# Altium PCB main.PcbDoc
Units mm, origin at the board's own origin, x right, y up, seen from the top; angles counter-clockwise.
Board outline 51 x 57 mm, 4 copper layers (Top Layer, Int1 (GND), Int2 (PWR), Bottom Layer), stack 1.369 mm thick; 45 components, 57 nets, 218 pads, 122 vias.
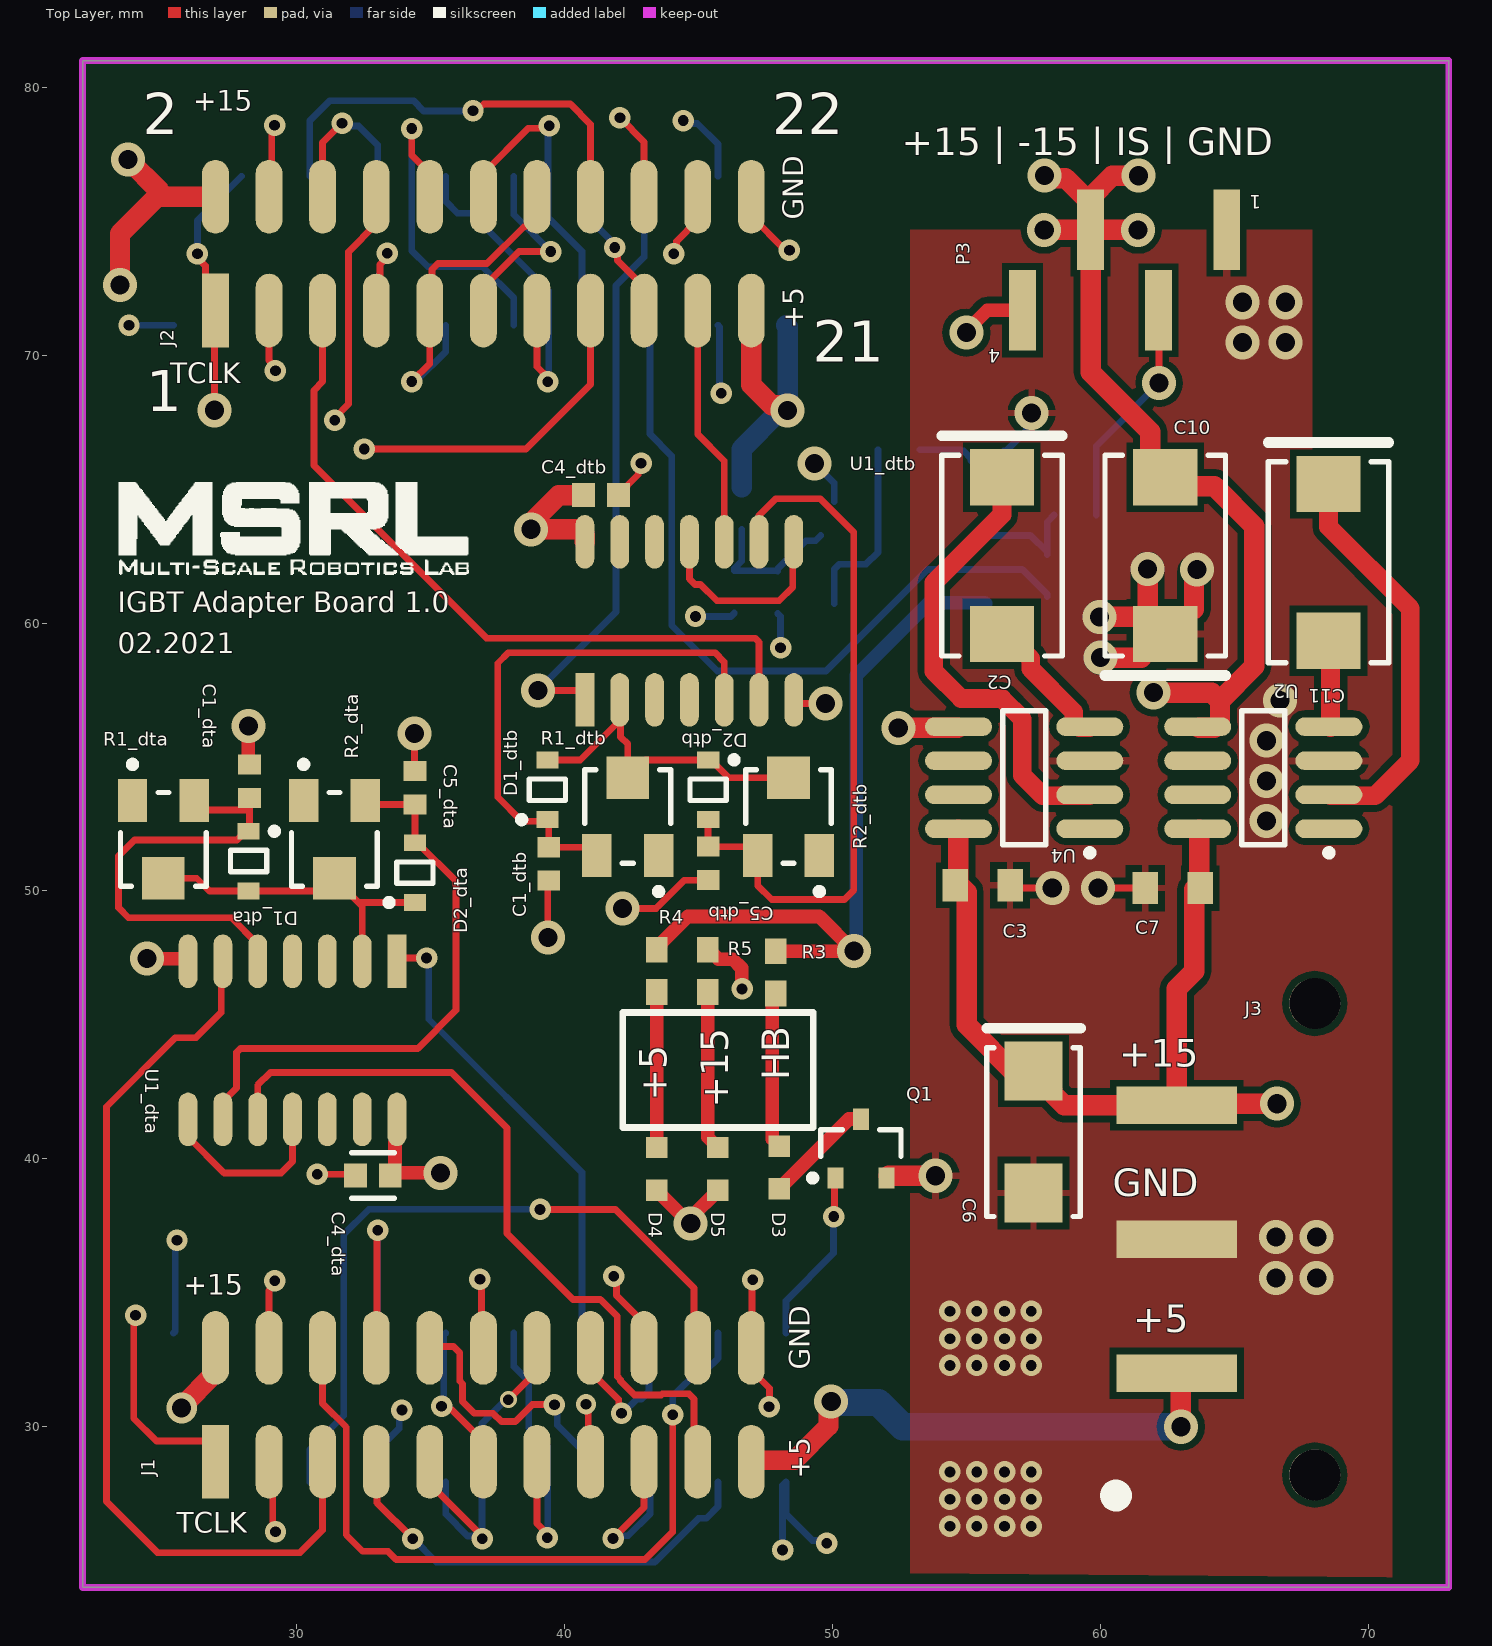
[diagram p0: Top Layer view]
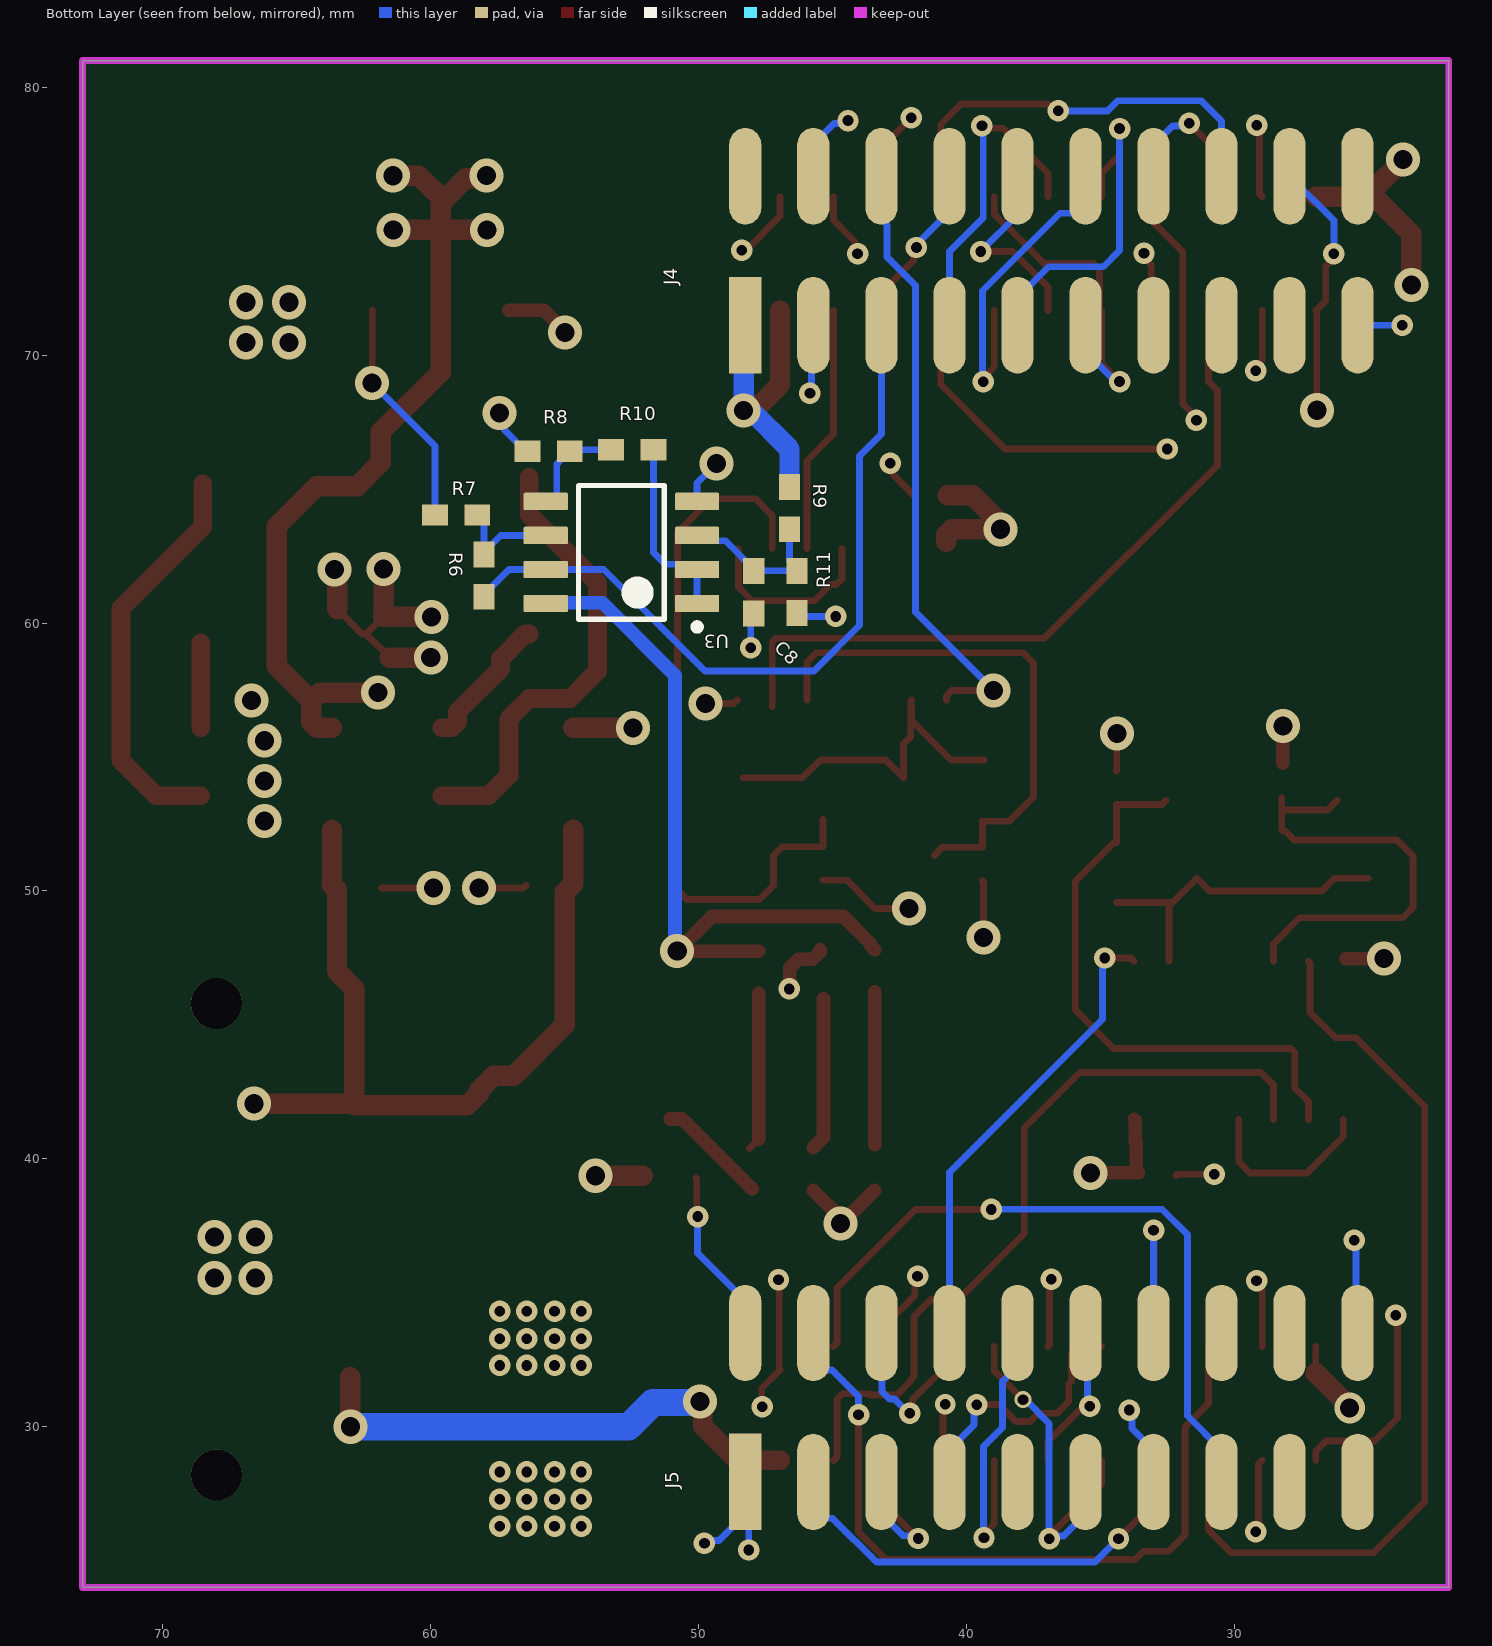
[diagram p1: Bottom Layer view, seen from below]
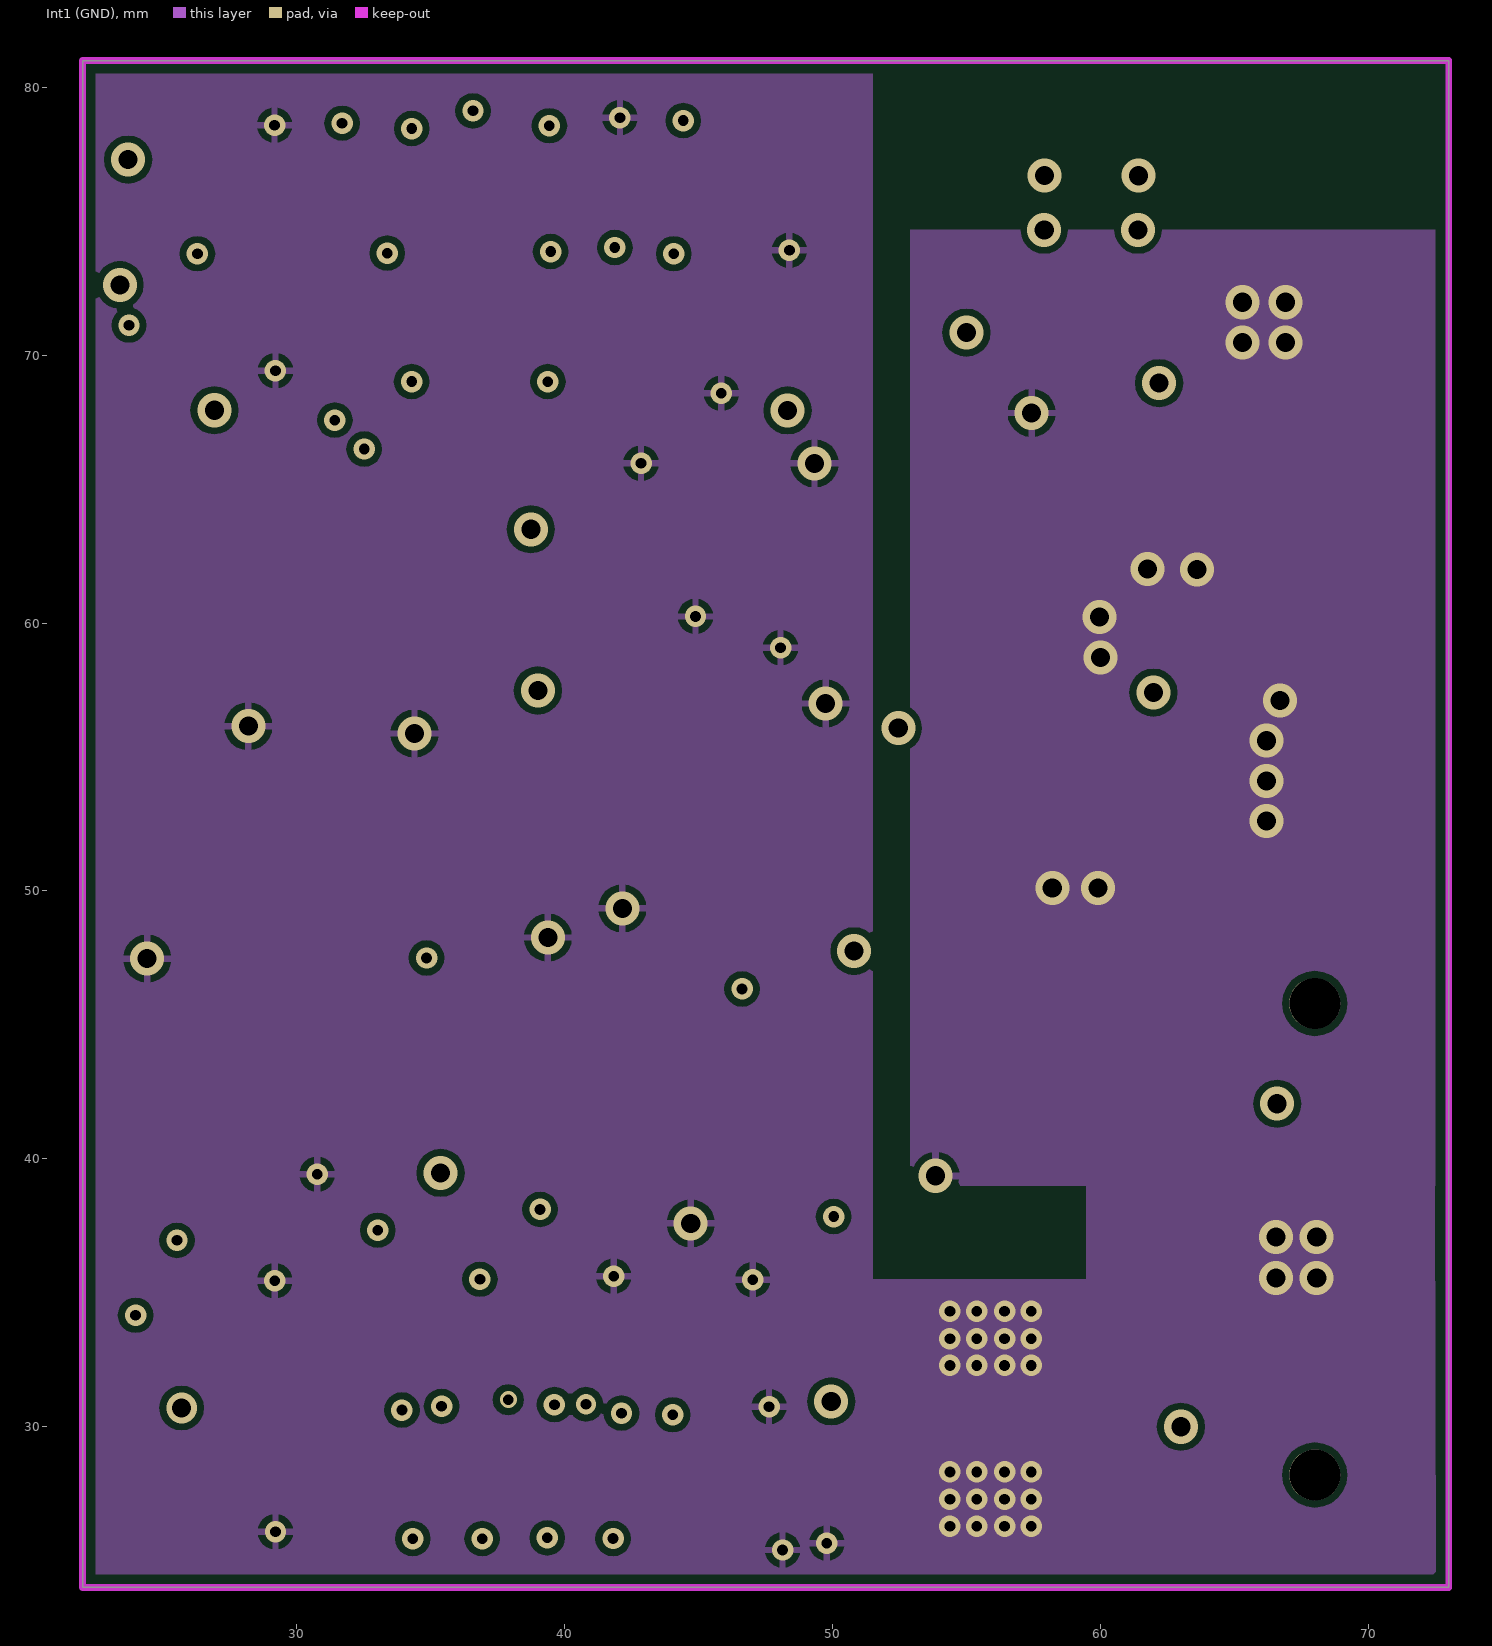
[diagram p2: Int1 (GND)]
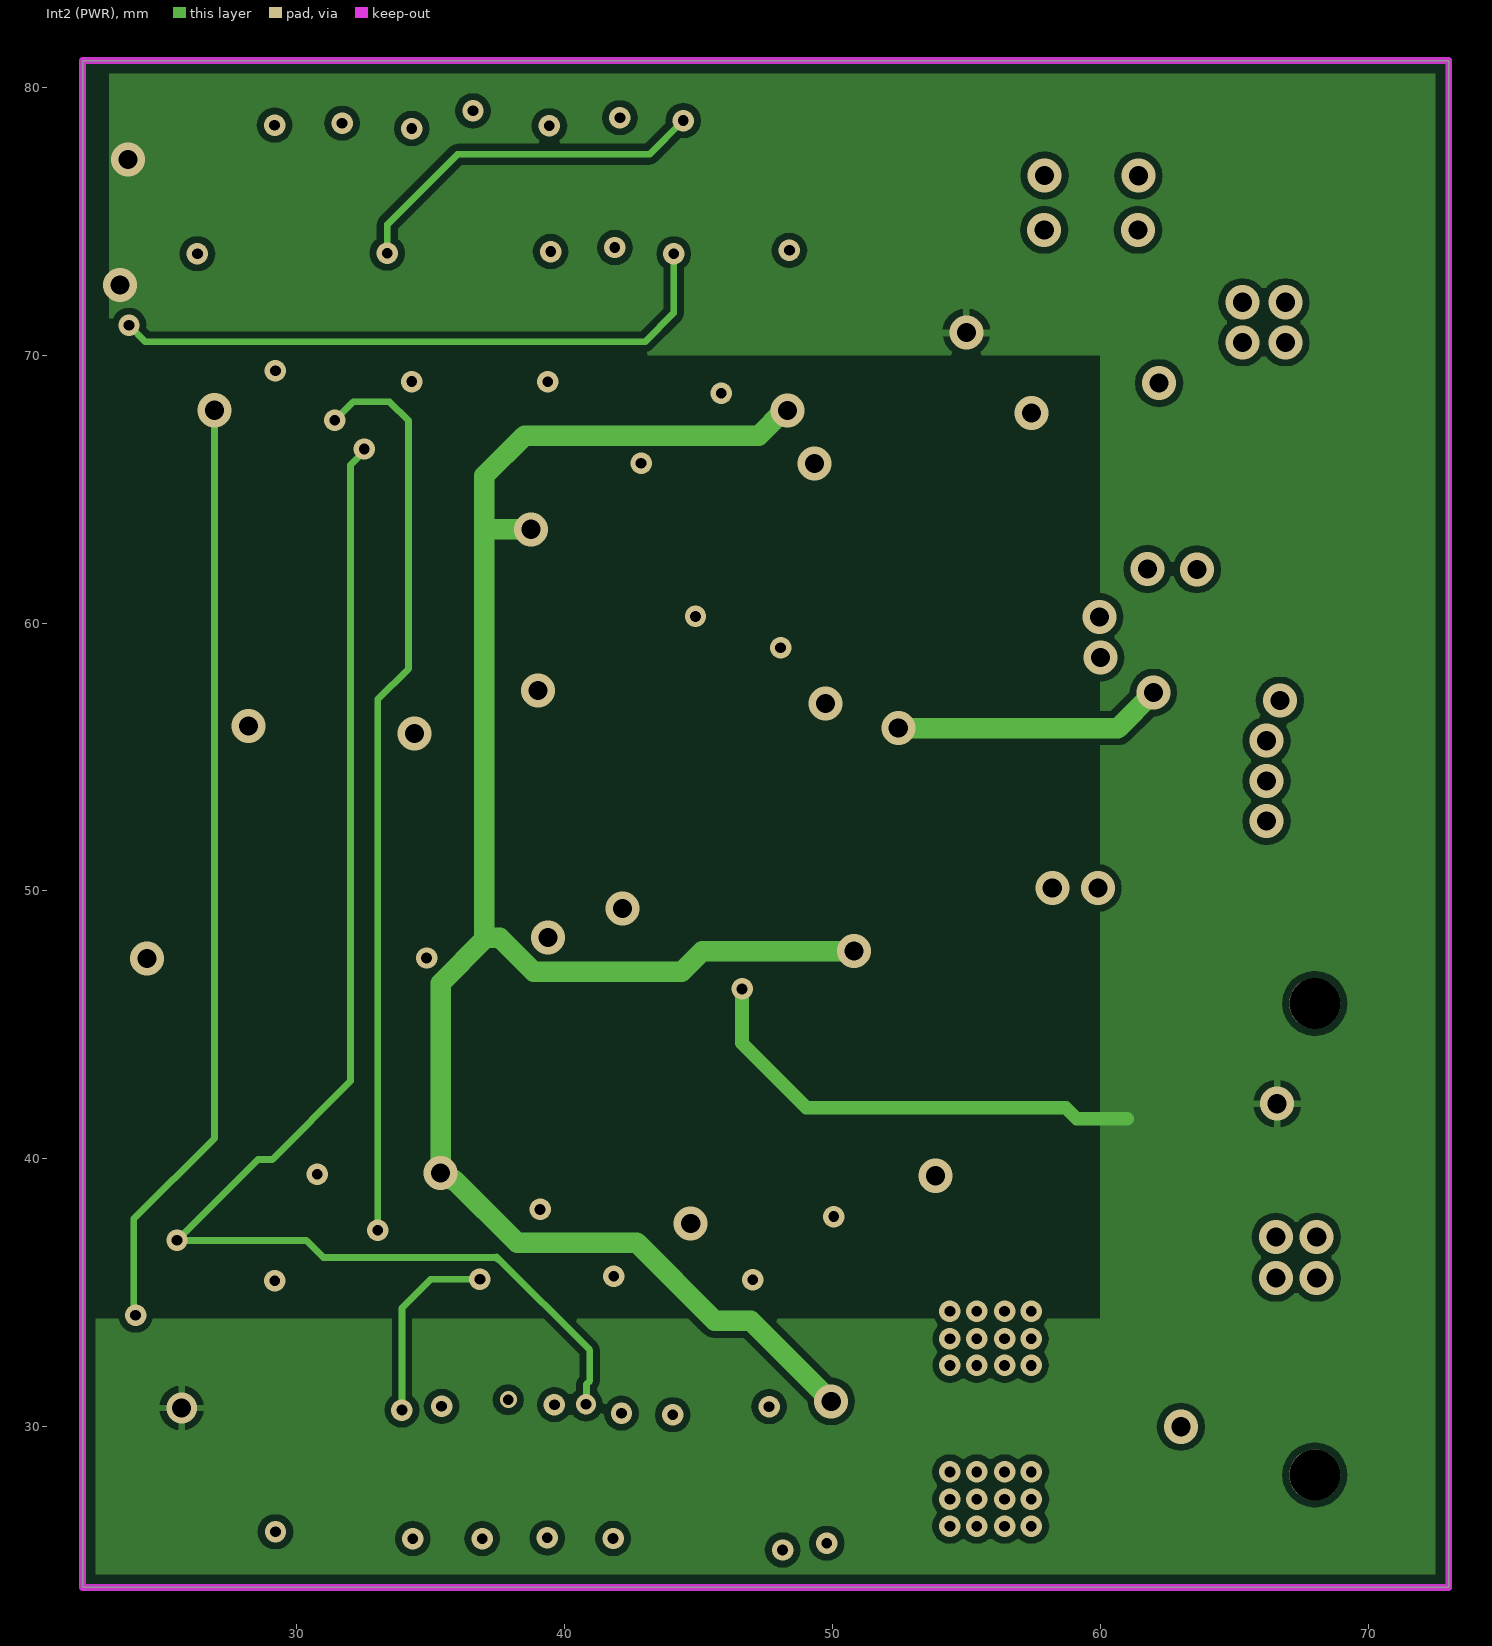
[diagram p3: Int2 (PWR)]
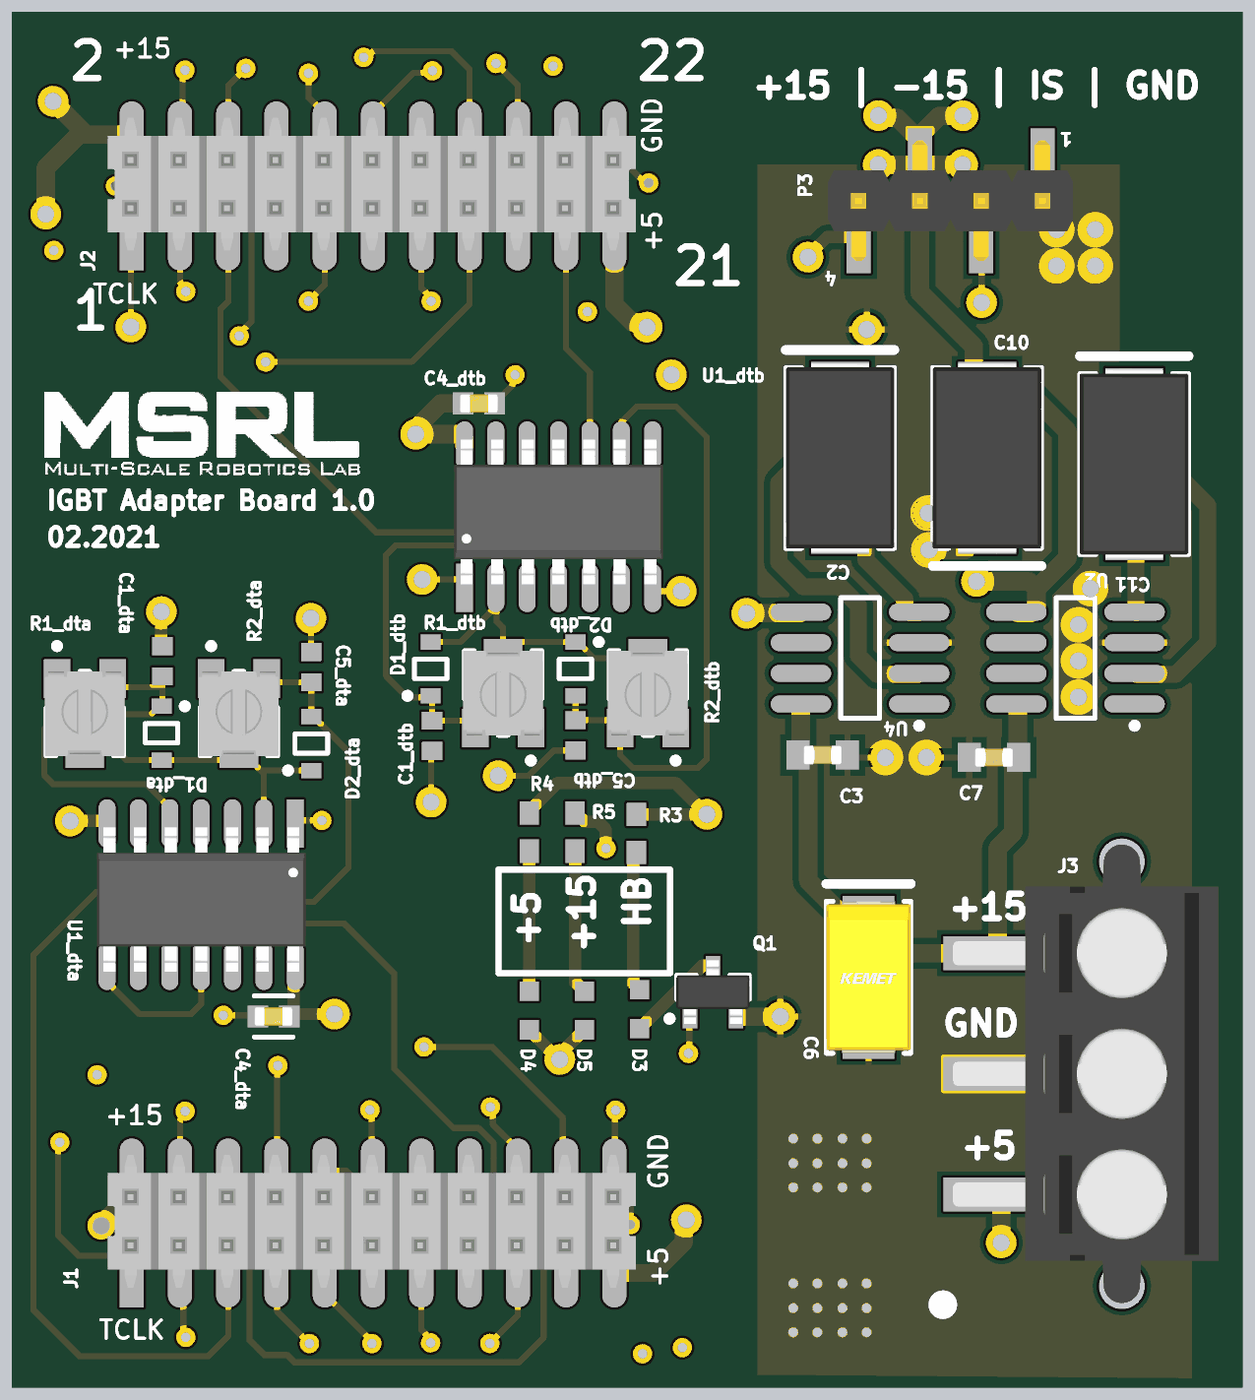
[diagram p4: 3D render of the assembled board from above, using the file's embedded part models]

## Layer stack, top to bottom
Top Solder: solder mask 0.0254, SM-001, Dk 4
Top Layer: signal copper 0.035
Dielectric 1: prepreg 0.1295, PP-017, Dk 4.3
Dielectric 2: prepreg 0.1295, PP-017, Dk 4.3
Int1 (GND): signal copper 0.035
Dielectric 3: core 0.7112, Core-039, Dk 4.8
Int2 (PWR): signal copper 0.035
Dielectric 4: prepreg 0.1295, PP-017, Dk 4.3
Dielectric 5: prepreg 0.1295, PP-017, Dk 4.3
Bottom Layer: signal copper 0.035
Bottom Solder: solder mask 0.0254, SM-001, Dk 4

## Board outline
22,24 73,24 73,81 22,81

## Design rules (kind name [scope] priority, off if disabled: settings)
Clearance [All] p1: gap=0.254 ignorepadtopadclearanceinfootprint=FALSE except(0: Arc-Hole Track-Hole SMDPad-Hole THPad-Hole Via-Hole Fill-Hole Poly-Hole Region-Hole Text-Hole)
MinimumSolderMaskSliver [All] p1: minsoldermaskwidth=0.152
PolygonConnect direct_connect [InPadClass('direct_connect')] p1: connectstyle=Direct reliefconductorwidth=0.254 reliefentries=4 polygonreliefangle="90 Angle" airgapwidth=0.254
PolygonConnect [All] p2: connectstyle=Relief reliefconductorwidth=0.254 reliefentries=4 polygonreliefangle="90 Angle" airgapwidth=0.254
RoutingVias [All] p1: holewidth=0.711 width=1.27 viastyle="Through Hole" minholewidth=0.711 minwidth=1.27 maxholewidth=0.711 maxwidth=1.27
SolderMaskExpansion [All] p1: expansion=0.102 istentingtop=FALSE
Width [All] p1: maxlimit=3 minlimit=0.254 preferedwidth=0.254
29 further rules are at their usual default settings.

## Classes and differential pairs
component class Designator: C8 R6 R7 R8 R9 R10 R11 U3
pad class direct_connect: C10-2 U1_dta-3 U1_dtb-3
component class main: C2 C3 C6 C7 C10 C11 D3 D4 D5 J1 J2 J3 J4 J5 P3 Q1 R3 R4 R5 U2 U4
component class dtb: C1_dtb C4_dtb C5_dtb D1_dtb D2_dtb R1_dtb R2_dtb U1_dtb
component class dta: C1_dta C4_dta C5_dta D1_dta D2_dta R1_dta R2_dta U1_dta
channel class delay: delay_topp1 delay_topp2

## Components (designator, comment, footprint, x,y, rotation, side; value= is the part's Value field where it differs from the comment)
C1_dta "GRM1885C1H100JA01D" CAPC1608X90X35LL10T15 28.236,54.095 r270 top (schematic designator C1)
C1_dtb "GRM1885C1H100JA01D" CAPC1608X90X35LL10T15 39.407,51.008 r90 top (schematic designator C1)
C2 "TPSD226M025R0200" AVX-7343-31_L 56.32,62.52 r270 top
C3 "100nF 50V" FP-CGA3E-0_3-0_1-IPC_A 55.6,50.208 r0 top
C4_dta "C0603X104K5RACTU" FP-C0603-CJ-MFG 32.84,39.375 r180 top value=100nF (schematic designator C4)
C4_dtb "C0603X104K5RACTU" FP-C0603-CJ-MFG 41.354,64.779 r0 top value=100nF (schematic designator C4)
C5_dta "GRM1885C1H100JA01D" CAPC1608X90X35LL10T15 34.407,53.85 r270 top (schematic designator C5)
C5_dtb "GRM1885C1H100JA01D" CAPC1608X90X35LL10T15 45.357,51.028 r90 top (schematic designator C5)
C6 "T491C106M025AT" KEMT-T491-C_L 57.5,41 r270 top
C7 "100nF 50V" FP-CGA3E-0_3-0_1-IPC_A 62.7,50.108 r180 top
C8 "100nF" 0805 47.951,61.938 r270 bottom
C10 "TPSD226M025R0200" AVX-7343-31_L 62.416,62.52 r90 top
C11 "TPSD226M025R0200" AVX-7343-31_L 68.512,62.266 r270 top
D1_dta "BAT54HT1G" ONSC-SOD-323-2-477-02_V 28.197,51.115 r270 top (schematic designator D1)
D1_dtb "BAT54HT1G" ONSC-SOD-323-2-477-02_V 39.354,53.779 r90 top (schematic designator D1)
D2_dta "BAT54HT1G" ONSC-SOD-323-2-477-02_V 34.407,50.684 r90 top (schematic designator D2)
D2_dtb "BAT54HT1G" ONSC-SOD-323-2-477-02_V 45.354,53.779 r270 top (schematic designator D2)
D3 "150060BS55040" LED_BLUE_0603 48.006,39.878 r270 top
D4 "732-12014-1-ND" LED_GREEN_0603 43.434,39.624 r270 top
D5 "732-12014-1-ND" LED_GREEN_0603 45.72,39.624 r270 top
J1 "header_22_milligrid" header_22_milligrid 26.964,30.893 r90 top
J2 "header_22_milligrid" header_22_milligrid 26.964,73.866 r90 top locked
J3 "691709710303" 691709710303 68,37 r90 top
J4 "header_f_20_imp" header_f_20_imp 48.26,71.12 r90 bottom locked
J5 "header_f_20_imp" header_f_20_imp 48.26,27.94 r90 bottom locked
P3 "61000418221" 61000418221 60.9,73.176 r180 top
Q1 "2N7002-T1-E3" VISH-TO-236-3_A_L 51.054,40.386 r90 top
R1_dta "3313J-1-503E" BOUR-3313J-1_V 25.016,51.925 r270 top (schematic designator R1)
R1_dtb "3313J-1-503E" BOUR-3313J-1_V 42.354,52.779 r90 top (schematic designator R1)
R2_dta "3313J-1-503E" BOUR-3313J-1_V 31.403,51.925 r270 top (schematic designator R2)
R2_dtb "3313J-1-503E" BOUR-3313J-1_V 48.354,52.779 r90 top (schematic designator R2)
R3 "res_smd" 0805 47.879,47.752 r270 top
R4 "res_smd" 0805 43.434,47.806 r270 top
R5 "res_smd" 0805 45.339,47.806 r270 top
R6 "200k" 0805 58.014,62.563 r270 bottom
R7 "100k" 0805 59.842,64.033 r180 bottom
R8 "100k" 0805 56.391,66.421 r180 bottom
R9 "13k" 0805 46.609,65.078 r270 bottom
R10 "200k" 0805 51.689,66.472 r0 bottom
R11 "1.6k" 0805 46.33,61.951 r270 bottom
U1_dta "74HC14D" SOP14_narrow 33.74,47.375 r270 top (schematic designator U1)
U1_dtb "74HC14D" SOP14_narrow 40.754,57.133 r90 top locked (schematic designator U1)
U2 "TC7662BEOA" SOIC-OA8_M 66.077,54.229 r180 top
U3 "OPA2340UA/2K5" D0008A_M 52.883,62.636 r0 bottom locked
U4 "TC7662BEOA" SOIC-OA8_M 57.15,54.229 r180 top

## Footprints (in the part's own frame and the unit in brackets; to place one, negate y for a bottom-side part, rotate by r counter-clockwise, add the part's x,y. Pads: shape width x height; smd on the part's side, far side on the other; paste and mask are expansions set on the pad)
0805 [mm]
  rect 0.965x0.8 smd: 1(0,0) 2(1.577,0)
  body extent -0.13,-0.64 1.78,0.64, height 0.65
61000418221 [mm] "Pin Header, pitch 2.54 mm, SMD, Vertical, single row, 4p"
  rect 1x3 smd: 1(-3.81,-1.5) 2(-1.27,1.5) 3(1.27,-1.5) 4(3.81,1.5)
  body extent -5.08,-2.5 5.08,2.5, height 9.33
691709710303 [mm] "Horizontal Entry SMT with Pressure Clamp, pitch 5mm, 03p"
  rect 1.4x4.5 smd: 1(-5,5.15) 2(0,5.15) 3(5,5.15)
  round 1.9 hole 1.9 unplated: M1(-8.8,0) M2(8.8,0)
  silkscreen extent -9.76,7.23 -9.38,7.61, body extent -9.5,-4 9.5,7, height 9.95
AVX-7343-31_L [mm] "Molded Capacitor, 2-Leads, Body 7.5x4.5mm, IPC High Density"
  rect 2.1x2.4 smd: 1(-2.925,0) 2(2.925,0)
  silkscreen extent -4.47,-2.25 3.75,2.25, body extent -3.97,-2.25 3.97,2.25, height 3.1
BOUR-3313J-1_V [mm] "SMD, 3-Leads, Body 3.5x3.2mm, Pitch 1.15mm"
  rect 1.6x1.1 smd paste+0: 1(-1.45,-1.15) 3(-1.45,1.15)
  rect 1.6x1.6 smd paste+0: 2(1.45,0)
  silkscreen extent -2.92,-1.6 1.75,1.6, body extent -1.75,-1.65 1.75,1.65, height 2.11
CAPC1608X90X35LL10T15 [mm] "Chip Capacitor, 2-Leads, Body 1.60x0.80mm, IPC High Density"
  rect 0.75x0.85 smd: 1(-0.625,0) 2(0.625,0)
  body extent -0.85,-0.45 0.85,0.45, height 0.9
D0008A_M [mm] "SOIC, 8-Leads, Body 5x4mm, Pitch 1.27mm, IPC Low Density"
  rrect15% 1.65x0.65 smd: 1(-2.825,1.905) 2(-2.825,0.635) 3(-2.825,-0.635) 4(-2.825,-1.905) 5(2.825,-1.905) 6(2.825,-0.635) 7(2.825,0.635) 8(2.825,1.905)
  silkscreen extent -2.95,-2.5 1.6,2.9, body extent -3,-2.45 3,2.45, height 1.63
FP-C0603-CJ-MFG [mm]
  rect 0.85x0.9 smd paste+0 mask+0: 1(-0.65,0) 2(0.65,0)
  silkscreen extent -0.8,-0.85 0.8,0.85, body extent -1.2,-0.6 1.2,0.6, height 0.25
FP-CGA3E-0_3-0_1-IPC_A [mm]
  rect 0.956x1.206 smd paste+0 mask+0: 1(-1.025,0) 2(1.025,0)
  body extent -2,-1.1 2,1.1, height 0.25
header_22_milligrid [mm]
  rect 2.75x1 smd: 1(-2.199,0)
  oval 2.75x1 smd: 2(2.051,0) 3(-2.199,-2) 4(2.051,-2) 5(-2.199,-4) 6(2.051,-4) 7(-2.199,-6) 8(2.051,-6) 9(-2.199,-8) 10(2.051,-8) 11(-2.199,-10) 12(2.051,-10) 13(-2.199,-12) 14(2.051,-12) 15(-2.199,-14) 16(2.051,-14) 17(-2.199,-16) 18(2.051,-16) 19(-2.199,-18) 20(2.051,-18) 21(-2.199,-20) 22(2.051,-20)
  body extent -2.75,-20.9 2.75,1, height 6.55
header_f_20_imp [mm]
  rect 3.6x1.2 smd: 1(0,0)
  oval 3.6x1.2 smd: 2(5.56,0) 3(0,-2.54) 4(5.56,-2.54) 5(0,-5.08) 6(5.56,-5.08) 7(0,-7.62) 8(5.56,-7.62) 9(0,-10.16) 10(5.56,-10.16) 11(0,-12.7) 12(5.56,-12.7) 13(0,-15.24) 14(5.56,-15.24) 15(0,-17.78) 16(5.56,-17.78) 17(0,-20.32) 18(5.56,-20.32) 19(0,-22.86) 20(5.56,-22.86)
  body extent -0.77,-24.2 6.27,1.2, height 7.32
KEMT-T491-C_L [mm] "Molded Capacitor, 2-Leads, Body 6.30x3.50mm, IPC High Density"
  rect 2.2x2.15 smd: 1(-2.275,0) 2(2.275,0)
  silkscreen extent -3.87,-1.75 3.15,1.75, body extent -3.15,-1.75 3.15,1.75, height 2.79
LED_BLUE_0603 [mm]
  rect 0.8x0.8 smd: A(-0.6,0) C(1,0)
  body extent -0.6,-0.4 1,0.4, height 0.4
LED_GREEN_0603 [mm]
  rect 0.8x0.8 smd: A(-0.8,0) C(0.8,0)
  body extent -0.8,-0.4 0.8,0.4, height 0.4
ONSC-SOD-323-2-477-02_V [mm] "SOD, 2-Leads, Body 1.7x1.25mm"
  rect 0.63x0.83 smd: 1(-1.115,0) 2(1.115,0)
  silkscreen extent -1.24,-0.67 0.4,1.09, body extent -0.85,-0.63 0.85,0.63, height 1.06
SOIC-OA8_M [mm] "SOIC, 8-Leads, Body 4.9x3.9mm, Pitch 1.27mm, IPC Low Density"
  oval 2.5x0.7 smd: 1(-2.45,1.905) 2(-2.45,0.635) 3(-2.45,-0.635) 4(-2.45,-1.905) 5(2.45,-1.905) 6(2.45,-0.635) 7(2.45,0.635) 8(2.45,1.905)
  silkscreen extent -2.58,-2.5 0.8,2.93, body extent -2,-2.5 2,2.5, height 1.75
SOP14_narrow [mm]
  rect 2x0.7 smd: 1(0,0)
  oval 2x0.7 smd: 2(0,-1.3) 3(0,-2.6) 4(0,-3.9) 5(0,-5.2) 6(0,-6.5) 7(0,-7.8) 8(5.9,-7.8) 9(5.9,-6.5) 10(5.9,-5.2) 11(5.9,-3.9) 12(5.9,-2.6) 13(5.9,-1.3) 14(5.9,0)
  body extent 0.16,-8.22 6.14,0.43, height 1.35
VISH-TO-236-3_A_L [mm] "SOT-23, 3-Leads, Body 3.04x1.4mm, Pitch 0.95mm, IPC High Density"
  rect 0.8x0.6 smd: 1(-1.1,0.95) 2(-1.1,-0.95) 3(1.1,0)
  silkscreen extent -1.22,-1.5 0.7,1.92, body extent -1.32,-1.52 1.32,1.52, height 1.12

## Part data
C1_dta C1_dtb C5_dta C5_dtb: library part CMP-2006-02592-1, Manufacturer=Murata, Part Number=GRM1885C1H100JA01D
C2 C10 C11: library part CMP-2000-07302-1, "Tantalum Capacitor, 22 uF, +/- 20%, 25 V, -55 to 125 degC, 2-Pin SMD, RoHS, Tape and Reel", Capacitance=22µF, ESR (Equivalent Series Resistance)=200mOhm, Lifetime @ Temp.=-, Manufacturer=AVX, Manufacturer Size Code=D, Operating Temperature=-55°C~125°C, Package / Case=2917(7343Metric), Package Description="2-Pin Surface Mount Device, Body 7.3 x 4.35 mm", Package Reference=7343-31, Standard Package=1, Tolerance=±20%, Voltage - Rated=25V, Category=Capacitors, Datasheet URL=https://datasheet.ciiva.com/11793/0900766b80066cb4-11793194.pdf, Datasheet Version=02/2004, Family=TantalumCapacitors, Featured Product=TPSCapacitors, Features=GeneralPurpose, Height - Seated (Max)="0.122\"(3.10mm)", Lead Spacing=-, Manufacturer URL=http://www.avx.com/, Mounting Technology=SurfaceMount, Mounting Type=SurfaceMount, Online Catalog=TPSSeries, Other Names=478-4106-6, Packaging=Digi-Reel®, Product Training Modules=ComponentSolutionsforSmartMeterApplications, Series=TPS, Size / Dimension="0.287\"Lx0.169\"W(7.30mmx4.30mm)", Type=Molded
C3 C7: library part CMP-2000-07546-2, "Cap Ceramic 100nF 50V X7R 10% Pad SMD 0603 +125°C Automotive T/R", Capacitance=100nF, Case Code (Imperial)=0603, Case Code (Metric)=1608, Dielectric=X7R, Max Operating Temperature=125°C, Min Operating Temperature=-55°C, Package Quantity=1, Ratings=AEC-Q200, Tolerance=10%, Voltage=50V, Case/Package=0603, Composition=Ceramic, Depth=0.8mm, Height=0.8mm, Lead Free="Lead Free", Length=1.6mm, Mount="Surface Mount", Packaging="Tape and Reel", Radiation Hardening=No, REACH SVHC="No SVHC", Termination=SMD/SMT, Thickness=0.035inch, Voltage Rating=50V, Voltage Rating (DC)=50V, Weight=7.1E-05oz, Width=0.8mm
C4_dta C4_dtb: library part CMP-2006-03300-2, "CAP CER 0.1UF 50V X7R 0603", Capacitance=100nF, Manufacturer=Kemet, Package=C0603-CJ, Temperature="-55°C to +125°C", Temperature Characteristic=X7R, Temperature Coefficient=15%, Temperature Range High=+125°C, Temperature Range Low=-55°C, Tolerance=10%, Voltage=50V, Automotive=No, Category=Cap, ComponentLink2Description=Datasheet, ComponentLink2URL=https://content.kemet.com/datasheets/KEM_C1013_X7R_FT-CAP_SMD.pdf, Device Class L1="Passive Components", Device Class L2=Capacitors, Device Class L3="Ceramic Capacitors", Digikey Description="CAP CER 0.1UF 50V X7R 0603", Height=0.95mm, Ipc Land Pattern Name=CAPC16080X80, Lead Free=Yes, Manufacturer Part Number=C0603X104K5RACTU, Material=Ceramic, Mouser Description="Capacitor; Ceramic; Cap 0.1uF; Tol+10%; SMT; Flexible Termination; Vol-Rtg 50V; TR", Octopart=https://octopart.com/c0603x104k5ractu-kemet-9145062, RoHS=TRUE, Voltage Rating=50V
C6: library part CMP-2000-07199-1, "Tantalum Surface Mount Capacitor, 10 uF, +/- 20%, 25 V, -55 to 125 degC, 2-Pin SMD, RoHS, Tape and Reel", Capacitance=10000000pF, Case Code=C, Case Style=Molded, Manufacturer=Kemet, Operating Temp Range=-55Cto125C, Package / Case=6032-28, Package Description="2-Pin Surface Mount Device, Body 6 x 3.2 mm", Package Reference=T491-C, Tolerance (+ or -)=20%, Voltage=25VDC, Construction=SMTChip, Datasheet URL=http://www.kemet.com/Lists/ProductCatalog/Attachments/254/KEM_T2005_T491.pdf, Datasheet Version=06/2016, DCL=2.5uA, DF=6%, ESR=1.5ohm, Failure Rate=NotRequired, Insulation=NotRequired, Lead Spacing (nom)=NotRequiredmm, Length W/Weld=NotRequiredmm, Length W/Weld (max)=NotRequiredmm, Manufacturer URL=http://www.kemet.com/, Mounting Style=SurfaceMount, Mounting Technology=SurfaceMount, Packaging=TapeandReel, Polarity=Polar, Product Depth (mm)=3.2mm, Product Diameter (mm)=NotRequiredmm, Product Height (mm)=2.5mm, Product Length (mm)=6mm, Rad Hardened=No, Seal=NotRequired, Seated Plane Height=NotRequiredmm, Wire Form=NotRequired
C8: library part cap_smd
D1_dta D1_dtb D2_dta D2_dtb: library part CMP-1055-00462-1, "Schottky Barrier Diode, 2-Pin SOD-323, Pb-Free, Tape and Reel", Manufacturer="On Semiconductor", ComponentLink1Description="Manufacturer URL", ComponentLink1URL=http://www.onsemi.com/, ComponentLink2Description=Datasheet, ComponentLink2URL=http://www.onsemi.cn/pub_link/Collateral/BAT54HT1-D.PDF, ComponentLink3Description="Package Specification", ComponentLink3URL=http://www.onsemi.com/pub_link/Collateral/477-02.PDF.1, Configuration=Single, DatasheetVersion="Rev. 6", IFSM Max (A)=0.6, Mounting Technology="Surface Mount", PackageDescription="2-Pin SOD, Body 1.7 x 1.25 mm", PackageReference=SOD-323-2-477-02, PackageVersion="Rev. H, 03/2007", Packing="Tape and Reel", PartNumber=BAT54HT1G, RoHS=TRUE, trr Max (ns)=5
D3: library part led_blue_0603, Supplier Part Number 1=732-12013-1-ND, Supplier 1=Digi-Key
D4 D5: library part led_green_0603, Supplier 1=Digi-Key, Supplier Part Number 1=732-12014-1-ND
J1 J2: Supplier Part Number 1=23-0877592250-ND, Supplier 1=Digi-Key
J3: library part CMP-1502-03336-1, "Serie 7097 - 5.00 mm Horizontal Entry SMT with Pressure Clamp WR-TBL, 3 pin", Manufacturer="Wurth Elektronik", Operating Temperature=-45to130degC, Datasheet URL=http://katalog.we-online.de/em/datasheet/6917097103xx.pdf, Manufacturer URL=http://www.we-online.de, Mounting Technology=SMT, Package Reference=691709710303, Packaging=TapeandReelwithCap, Part Number=691709710303, Pin Number=3, Pitch=5.00mm, Publisher=WurthElektronik
J4 J5: Supplier Part Number 1=SAM11898-ND, Supplier 1=Digi-Key
P3: library part CMP-1502-01019-1, "SMT Vertical Pin Header WR-PHD, Pitch 2.54 mm, Single Row, 4 pins", Contact Resistance=20mOhm, Manufacturer="Wurth Elektronik", Operating Temperature=-40to125degC, Rated Current=3A, Withstanding Voltage=500VAC, Working Voltage=250VAC, Datasheet URL=https://katalog.we-online.de/em/datasheet/6100xx18221.pdf, Gender=Male, Manufacturer URL=http://www.we-online.de, Mounting Technology=SMT, Orientation=Vertical, Package Reference=61000418221, Packaging=Tube, Part Number=61000418221, Pin Number=4, Pitch=2.54mm, Publisher=WurthElektronik, Row Number=Single
Q1: library part CMP-2000-05565-1, "N-Channel MOSFET, 115 mA, 60 V, -55 to 150 degC, 3-Pin SOT23, RoHS, Tape and Reel", Continuous Drain Current Id=115mA, Drain Source Voltage Vds=60V, Manufacturer=Vishay, On Resistance Rds(on)=7.5ohm, Operating Temperature Max=150°C, Package Description="3-Pin Small Outline Transistor, Body 2.92 x 1.3 mm, Pitch 0.95 mm", Package Reference=TO-236-3, Power Dissipation Pd=200mW, Rds(on) Test Voltage Vgs=10V, Threshold Voltage Vgs=2.1V, Transistor Case Style=TO-236, Datasheet URL=http://www.vishay.com/docs/70226/70226.pdf, Datasheet Version="Rev. F, 07/2001", Manufacturer URL=http://www.vishay.com/, Mounting Technology=SurfaceMount, MSL=MSL1-Unlimited, No. of Pins=3, Package URL=http://www.vishay.com/docs/71196/71196.pdf, SVHC=NoSVHC(17-Dec-2014), Transistor Polarity=NChannel
R1_dta R1_dtb R2_dta R2_dtb: library part CMP-2000-05588-1, "3 mm Trimpot(R) Trimming Potentiometer, 50 KOhm, +/- 20%, 0.125 W, -55 to 125 degC, 3-Pin SMD, RoHS, Tape and Reel", Manufacturer=Bourns, Package Description="3-Pin Surface Mount Device, Body 3.5 x 3.2 mm, Pitch 1.15 mm", Package Reference=3313J-1, Power Rating=125mW, Resistance Tolerance=±20%, Temperature Coefficient=±150ppm/°C, Track Resistance=50kohm, Datasheet URL=http://www.bourns.com/docs/Product-Datasheets/3313.pdf, Datasheet Version=05/2016, Manufacturer URL=http://www.bourns.com/, Mounting Technology=SurfaceMount, No. of Turns=1, Potentiometer Mounting=SMD, SVHC=NoSVHC(19-Dec-2012)
R6 R7 R8 R9 R10 R11: library part res_smd
U1_dta U1_dtb: Supplier Part Number 1=1727-2783-1-ND, Supplier 1=Digi-Key
U2 U4: library part CMP-0132-00036-1, "Charge Pump DC-to-DC Voltage Converter, 10kHz, 35kHz, 8-Pin SOIC 150mil, Industrial Temperature", Code_IPC=SOIC127P600-8, DatasheetVersion="revA, Oct-2002", PackageDescription="8-Lead Plastic Small Outline (OA) - Narrow, 3.90mm Body [SOIC]", PackageReference=SOIC-OA8, PackageVersion="revBB, Aug-2009"
U3: library part CMP-0272-00789-3, "Single-Supply, Rail-to-Rail Operational Amplifier MicroAmplifier(TM) Series, 2.5 to 5.5 V, -40 to 85 degC, 8-pin SOIC (D8), Green (RoHS & no Sb/Br)", Manufacturer="Texas Instruments", Total Supply Voltage(Max)(+5V is 5, +/-5V is 10)=5.5, Total Supply Voltage(Min)(+5V is 5, +/-5V is 10)=2.5, CMRR(Min)(dB)=80, Code_JEDEC=MS-012, ComponentLink1Description="Manufacturer URL", ComponentLink1URL=http://www.ti.com/, ComponentLink2Description=Datasheet, ComponentLink2URL=http://www.ti.com/general/docs/lit/getliterature.tsp?genericPartNumber=OPA2340&fileType=pdf, ComponentLink3Description="Package Specification", ComponentLink3URL=http://www.ti.com/litv/pdf/msoi002j, DatasheetVersion=SBOS073B, Eco-Plan="Green (RoHS & no Sb/Br)", IIB(Max)(pA)=10, Iq per channel(Max)(mA)=0.95, Mounting Technology="Surface Mount", Number of Channels=2, Offset Drift(Typ)(uV/C)=2.5, PackageDescription="8-Pin Plastic Small Outline, Body 4.9 x 3.9 mm, Pitch 1.27 mm", PackageReference=D0008A, PackageVersion="4040047-3/M, 06/2011", PartNumber=OPA2340UA/2K5, Slew Rate(Typ)(V/us)=6, Sub Family="Low Input Bias Current Amp (<=10pA), Low Offset Voltage Amplifier (<=500uV), Low Supply Voltage Amplifier (<=2.7V), Precision Amplifier", Vio (25C)(Max)(mV)=0.5, Vn at 1kHz(Typ)(nV/rtHz)=25

## Via types
v1: diameter 0.8, hole 0.4, Top Layer to Bottom Layer, 72 vias
v2: diameter 1.27, hole 0.711, Top Layer to Bottom Layer, 47 vias
v3: diameter 0.635, hole 0.4, Top Layer to Bottom Layer, 1 vias
v4: diameter 0.762, hole 0.4, Top Layer to Bottom Layer, 1 vias
v5: diameter 1.143, hole 0.711, Top Layer to Bottom Layer, 1 vias

## Nets (pads, with @x,y where several pads share a name; then routed paths per layer and width w, separated by ;. In a path a pad name is that pad's centre, name@x,y a point inside that pad or via, vN(x,y) a via of type N, cw(c..) or ccw(c..) an arc to the next point about the centre after c; other vN are vias at no path point)
+3.3: J4.2
+5: C4_dta.1 C4_dtb.1 J1.21 J2.21 J3.1 J4.1 R3.1 R4.1 R9.1 U1_dta.14 U1_dtb.14 U3.8 | length 141.7
  Top Layer w0.254: C4_dta.1 C4_dta.1@33.59,39.475 ; J3.1 J3.1@63,31.85
  Top Layer w0.508: U1_dta.14 33.703,41.438 33.703,40.652 33.665,40.614 33.665,39.869 33.661,39.865 33.661,39.546 33.59,39.475 v2(35.365,39.475) ; R4.1 43.58,47.952 43.58,48.034 43.707,48.161 44.591,49.045 49.507,49.045 v2(50.8,47.752) R3.1@47.752,47.752
  Top Layer w0.737: J1.21@46.964,28.745 48.569,28.745 49.847,30.023 49.847,30.847 v2(49.949,30.949)
  Top Layer w0.762: C4_dtb.1 39.779,64.779 38.733,63.733 v2(38.733,63.502) 40.548,63.502 40.754,63.296 U1_dtb.14 ; J2.21 46.964,68.896 47.725,68.135 48.129,68.135 v2(48.323,67.94) ; v2(63,30) J3.1@63,31.85
  Int2 (PWR) w0.762: 37,48.26 37.574,48.26 38.844,46.99 44.372,46.99 45.134,47.752 v2(50.8,47.752) ; v2(38.733,63.502) 38.732,63.5 37,63.5 ; v2(48.323,67.94) 48.186,67.94 47.246,67 38.5,67 37,65.5 37,63.5 ; v2(49.949,30.949) 46.943,33.955 45.605,33.955 42.697,36.863 38.225,36.863 35.867,39.221 35.756,39.221 35.502,39.475 v2(35.365,39.475) 35.365,46.557 37,48.192 37,63.5
  Bottom Layer w0.508: v2(50.8,47.752) 50.883,47.835 50.883,58.045 53.594,60.757 55.682,60.757 U3.8
  Bottom Layer w0.762: R9.1 46.609,66.497 48.052,67.94 v2(48.323,67.94) 48.323,71.057 J4.1
  Bottom Layer w1.016: v2(49.949,30.949) 49.998,30.9 51.716,30.9 52.616,30 v2(63,30)
+15: C3.1 C6.1 C7.1 J1.2 J2.2 J3.3 P3.4 R5.1 U2.8 U4.8 | length 64.1
  Top Layer w0.254: J1.2@26.964,31.997 J1.2@26.964,32.995 ; J3.3 J3.3@62.908,42.058
  Top Layer w0.5: v2(54.991,70.84) 54.991,70.896 55.771,71.676 P3.4
  Top Layer w0.508: R5.1@45.466,47.806 45.466,47.723 45.739,47.45 46.276,47.45 46.602,47.124 46.602,46.361 v1(46.62,46.343)
  Top Layer w0.762: v2(23.398,72.623) 23.398,74.535 24.78,75.917 25.041,75.917 ; v2(23.704,77.3) 24.892,76.111 24.892,76.066 25.041,75.917 ; v5(25.699,30.701) 25.699,30.752 26.943,31.997 J1.2@26.964,31.997 ; J2.2 25.041,75.917 ; U4.8@54.688,52.287 54.688,50.27 55,49.958 55,45 56.893,43.107 57.643,43.107 58.194,42.556 58.194,42.446 58.64,42 J3.3 62.85,46.35 63.5,47 63.5,50.058 C7.1@63.55,50.108 ; J3.3@62.908,42.058 v2(66.597,42.058) ; C7.1@63.55,50.084 63.7,50.234 63.688,50.246 U2.8@63.688,52.287
  Int2 (PWR) w0.508: v1(46.62,46.343) 46.62,44.312 49.022,41.91 58.702,41.91 59.112,41.5 61,41.5
-15: C10.2 P3.3 U2.5 U4.5 | length 47.1
  Top Layer w0.254: v2(52.451,56.082) v2@52.459,56.09 ; U4.5@54.68,56.09 U4.5@54.688,56.097
  Top Layer w0.762: v2@52.459,56.09 U4.5@54.68,56.09 ; v2(57.9,74.676) P3.3 ; v2(57.912,76.708) 58.009,76.611 58.695,76.611 P3.3@59.63,75.676 ; v2(61.4,74.676) P3.3 ; v2(61.413,76.699) 60.443,76.699 59.63,75.886 P3.3@59.63,75.676 ; v2(61.976,57.404) 64.153,57.404 64.461,57.096 ; U2.5@63.688,56.097 64.255,56.097 64.461,56.303 64.461,57.096 ; P3.3 59.63,69.37 61.865,67.135 61.865,65.996 62.751,65.11 64.256,65.11 65.746,63.619 65.746,58.382 64.461,57.096 ; P3.3 P3.3@59.63,75.676
  Int2 (PWR) w0.762: v2(52.451,56.082) 60.654,56.082 v2(61.976,57.404)
CURR_SENSE: J4.5 R6.2 U3.7 | length 28.3
  Bottom Layer w0.254: J4.5 43.18,67.056 43.993,66.243 43.993,59.919 45.695,58.217 49.759,58.217 53.543,62.001 U3.7 57.08,62.001 58.014,61.068 R6.2
GND: C1_dta.1 C1_dtb.1 C3.2 C4_dta.2 C4_dtb.2 C5_dta.1 C5_dtb.1 C6.2 C7.2 C8.2 C10.1 D4.C D5.C J1.3 J1.4 J1.18 J1.22 J2.3 J2.4 J2.18 J2.22 J3.2 J4.3 J5.1 P3.1 Q1.2 R8.1 R11.2 U1_dta.7 U1_dtb.7 U2.3 U3.4 U4.3 | length 73.1
  Top Layer w0.254: U1_dta.7@25.84,47.475 U1_dta.7 ; C1_dta.1@28.19,54.766 C1_dta.1 ; J1.3@28.964,28.745 29.099,28.609 29.099,26.185 v1(29.204,26.081) ; J1.4@28.964,32.995 28.964,35.091 29.175,35.302 v1(29.175,35.45) ; J2.3 28.964,69.805 29.202,69.567 v1(29.202,69.419) ; J2.4 29.067,76.02 29.067,78.485 v1(29.17,78.589) ; v1(30.758,39.425) 32.14,39.425 C4_dta.2 ; v2(34.39,55.875) 34.39,54.492 C5_dta.1 ; v2(39.37,48.26) 39.37,50.347 C1_dtb.1 ; v1(41.828,35.62) 41.933,35.516 41.933,34.9 42.964,33.87 J1.18@42.964,32.995 ; C4_dtb.2 42.004,64.804 42.745,65.545 42.745,65.861 v1(42.85,65.965) ; v1(42.06,78.866) 42.964,77.962 J2.18 ; v2(42.151,49.351) 43.415,49.351 44.466,50.403 C5_dtb.1 ; v2@44.666,37.592 v2(44.704,37.592) v2@44.704,37.808 ; J2.22 46.964,75.19 48.239,73.914 v1(48.387,73.914) ; v1(47.02,35.491) 46.992,35.463 46.992,32.148 46.964,32.12 47.646,31.438 47.646,30.767 v1(47.629,30.75) ; U1_dtb.7 48.689,56.998 v2(49.74,56.998) ; Q1.2 Q1.2@52.088,39.37 ; C3.2@56.45,50.208 56.55,50.108 v2(58.2,50.108) ; v2(59.9,50.108) C7.2@61.85,50.108 ; C10.1@61.529,58.708 C10.1 ; C10.1@61.778,60.233 C10.1 ; C10.1@63.489,60.518 62.566,59.595 C10.1 ; v2@63.489,61.897 v2(63.6,62.008)
  Top Layer w0.508: v2(24.415,47.475) U1_dta.7@25.84,47.475 ; C1_dta.1@28.19,54.766 v2(28.19,56.15) ; D4.C v2@44.666,37.592 ; v2@44.704,37.808 D5.C
  Top Layer w0.762: Q1.2@52.088,39.37 v2(53.848,39.37) ; v2(59.97,60.233) C10.1@61.778,60.233 ; v2(60,58.708) C10.1@61.529,58.708 ; C10.1@61.758,60.253 v2(61.758,62.018) ; C10.1@63.489,60.518 v2@63.489,61.897
  Bottom Layer w0.254: v1(44.882,60.249) 46.205,60.249 R11.2 ; J4.3 45.783,71.056 45.783,68.644 v1(45.847,68.58) ; C8.2 48.057,60.254 v1(48.057,59.08) ; v1(48.133,25.4) 48.133,27.813 J5.1 48.26,26.74 49.242,25.758 49.68,25.758 v1(49.784,25.654) ; v2(49.327,65.964) 50.058,65.233 U3.4 ; R8.1 56.473,66.421 57.235,67.183 57.235,67.649 v2(57.429,67.843)
  other v1: 54.38,26.29 55.38,26.29 56.42,26.29 57.42,26.29 54.38,27.29 55.38,27.29 56.42,27.29 57.42,27.29 54.38,28.314 55.38,28.314 56.42,28.314 57.42,28.314 54.38,32.29 55.38,32.29 56.42,32.29 57.42,32.29 54.38,33.29 55.38,33.29 56.42,33.29 57.42,33.29 54.38,34.314 55.38,34.314 56.42,34.314 57.42,34.314
  other v2: 66.548,35.56 68.072,35.56 66.548,37.084 68.072,37.084 66.2,52.608 66.2,54.108 66.2,55.608 66.7,57.108 65.3,70.476 66.9,70.476 65.3,71.976 66.9,71.976
HEARTBEAT: J5.2 Q1.1 | length 6.7
  Top Layer w0.254: v1(50.038,37.846) 50.071,37.879 50.071,39.253 Q1.1
  Bottom Layer w0.254: J5.2 48.26,34.7 50.038,36.478 v1@50.038,38.016
LEGA_BTN_FLT: J1.13 J5.10 | length 11.2
  Top Layer w0.254: J1.13@38.964,28.745 38.964,26.384 39.349,25.999 v1(39.349,25.851)
  Bottom Layer w0.254: J5.10 38.1,32.242 38.66,31.683 38.66,29.968 39.37,29.257 39.37,25.872 v1(39.349,25.851)
LEGA_BTN_INP: J1.19 U1_dta.10 | length 28.8
  Top Layer w0.254: U1_dta.10 28.54,42.75 29.015,43.225 35.775,43.225 37.846,41.154 37.846,37.211 40.306,34.751 41.329,34.751 41.964,34.116 41.964,31.874 42.083,31.755 42.083,31.704 42.599,31.188 43.6,31.188 43.641,31.228 44.642,31.228 44.832,31.039 44.832,28.877 J1.19@44.964,28.745
LEGA_BTN_RDY_1: J1.16 J5.6 | length 6.5
  Top Layer w0.254: J1.16@40.964,32.995 40.964,32.069 42.015,31.018 42.015,30.612 v1(42.119,30.507)
  Bottom Layer w0.254: v1(42.119,30.507) 42.159,30.507 42.691,31.039 42.871,31.039 43.151,31.319 43.151,33.471 J5.6
LEGA_BTN_RDY_2: J1.17 J5.5 | length 6.4
  Top Layer w0.254: v1(41.804,25.828) 42.964,26.987 J1.17@42.964,28.745
  Bottom Layer w0.254: v1(41.804,25.828) 41.908,25.932 42.372,25.932 43.18,26.74 J5.5
LEGA_DUTY: J5.8 U1_dta.1 | length 17.6
  Top Layer w0.254: U1_dta.1 33.863,47.498 v1(34.842,47.498)
  Bottom Layer w0.254: v1(34.842,47.498) 34.925,47.415 34.925,45.212 40.64,39.497 J5.8
LEGA_ENABLE: J1.9 J1.14 J5.11 | length 14.9
  Top Layer w0.254: J1.9@34.964,28.745 34.964,27.87 36.918,25.916 v1(36.918,25.823) ; v3(37.897,31.01) 37.901,31.01 38.964,32.073 J1.14@38.964,32.995
  Bottom Layer w0.254: J5.11 35.56,26.74 36.373,25.927 36.7,25.927 36.918,25.709 36.918,30.121 37.807,31.01 v3(37.897,31.01)
LEGA_SIGI: J1.11 J5.12 | length 5.6
  Top Layer w0.254: v1(35.404,30.762) 35.508,30.658 35.749,30.658 36.964,29.443 J1.11@36.964,28.745
  Bottom Layer w0.254: v1(35.404,30.762) 35.482,30.84 35.482,33.422 J5.12
LEGA_SIGO: J1.12 J5.13 | length 12.8
  Top Layer w0.254: v1(36.835,35.503) 36.899,35.439 36.899,33.059 J1.12@36.964,32.995
  Int2 (PWR) w0.254: v1(33.924,30.623) 33.924,34.432 34.995,35.503 v1(36.835,35.503)
  Bottom Layer w0.254: J5.13 33.02,29.14 33.82,29.94 33.82,30.518 v1(33.924,30.623)
LEGA_TOP_FLT: J1.10 J5.7 | length 10.4
  Top Layer w0.254: J1.10@34.964,32.995 35.845,32.995 36.083,32.757 36.083,31.704 36.185,31.602 36.185,30.94 36.625,30.501 37.329,30.501 37.639,30.19 38.155,30.19 38.791,30.826 v1(39.617,30.826)
  Bottom Layer w0.254: v1(39.617,30.826) 39.721,30.722 39.721,30.059 40.64,29.14 J5.7
LEGA_TOP_INP: J1.5 U1_dta.6 | length 34.2
  Top Layer w0.254: U1_dta.6 27.178,47.313 27.178,45.466 26.236,44.524 25.474,44.524 22.895,41.945 22.895,27.205 24.8,25.3 30.125,25.3 30.964,26.139 J1.5@30.964,28.745
LEGA_TOP_RDY_1: J1.6 J5.4 | length 28.7
  Top Layer w0.254: J1.6@30.964,32.995 30.964,30.866 31.845,29.985 31.845,25.966 32.461,25.349 33.403,25.349 33.711,25.042 43,25.042 44.03,26.072 v1(44.03,30.447)
  Bottom Layer w0.254: v1(44.03,30.447) 44.03,31.127 45.022,32.119 45.283,32.119 45.72,32.556 J5.4
LEGA_TOP_RDY_2: J1.7 J5.3 | length 17
  Top Layer w0.254: J1.7@32.964,28.745 32.992,28.717 32.992,27.16 v1(34.329,25.823)
  Bottom Layer w0.254: v1(34.329,25.823) 35.205,24.947 43.363,24.947 44.998,26.582 45.283,26.582 45.72,27.019 J5.3
LEGB_BTN_FLT: J2.13 J4.12 | length 12.4
  Top Layer w0.254: J2.13 38.964,69.569 39.372,69.161 v1(39.372,69.013)
  Bottom Layer w0.254: J4.12 35.56,75.736 35.997,75.299 36.508,75.299 39.402,72.405 39.402,69.043 v1(39.372,69.013)
LEGB_BTN_INP: J2.19 U1_dtb.10 | length 9.3
  Top Layer w0.254: J2.19 44.964,67.05 45.954,66.06 U1_dtb.10@45.954,62.779
LEGB_BTN_RDY_1: J2.16 J4.16 | length 16.1
  Top Layer w0.254: v1(36.576,79.121) 36.724,79.121 36.978,79.375 40.209,79.375 40.964,78.62 J2.16
  Bottom Layer w0.254: J4.16 30.48,78.74 31.24,79.5 34.354,79.5 34.733,79.121 v1(36.576,79.121)
LEGB_BTN_RDY_2: J2.17 J4.8 | length 6
  Top Layer w0.254: v1(41.872,74.019) 41.976,73.915 41.976,73.529 42.964,72.542 J2.17
  Bottom Layer w0.254: J4.8 40.64,75.365 41.872,74.134 v1(41.872,74.019)
LEGB_DUTY: J4.6 U1_dtb.1 | length 22.9
  Top Layer w0.254: v2(39,57.484) 40.531,57.484 40.531,57.5 40.754,57.277 U1_dtb.1
  Bottom Layer w0.254: v2(39,57.484) 39,57.5 41.91,60.41 41.91,72.602 42.967,73.659 42.967,74.858 42.999,74.89 42.999,76.499 J4.6
LEGB_ENABLE: J2.9 J2.14 J4.11 | length 12.7
  Top Layer w0.254: v1(34.287,69.014) 34.964,69.691 J2.9 35.042,71.746 35.042,73.201 35.264,73.423 37.101,73.423 38.473,74.795 38.515,74.795 38.964,75.244 J2.14
  Bottom Layer w0.254: v1(34.287,69.014) 34.434,69.014 35.56,70.14 J4.11
LEGB_SIGI: J2.11 J4.10 | length 7.3
  Top Layer w0.254: J2.11 36.964,72.542 38.29,73.869 v1(39.474,73.869)
  Bottom Layer w0.254: J4.10 38.1,75.243 v1(39.474,73.869)
LEGB_SIGO: J2.12 J4.7 | length 12.1
  Top Layer w0.254: J2.12 36.964,76.792 38.646,78.474 39.338,78.474 v1(39.427,78.563)
  Bottom Layer w0.254: v1(39.427,78.563) 39.376,78.512 39.376,75.143 40.64,73.879 J4.7
LEGB_TOP_FLT: J2.10 J4.9 | length 12.9
  Top Layer w0.254: v1(34.289,78.461) 34.289,77.466 34.964,76.792 J2.10
  Bottom Layer w0.254: v1(34.289,78.461) 34.289,73.906 34.894,73.301 36.935,73.301 38.1,72.136 J4.9
LEGB_TOP_INP: J2.5 U1_dtb.6 | length 27.7
  Top Layer w0.254: J2.5 30.964,69.013 30.638,68.687 30.638,65.882 37.084,59.436 47.105,59.436 47.254,59.287 U1_dtb.6@47.254,56.879
LEGB_TOP_RDY_1: J2.6 J4.14 | length 5.9
  Top Layer w0.254: J2.6 30.964,77.935 v1(31.69,78.661)
  Bottom Layer w0.254: v1(31.69,78.661) 31.794,78.556 32.309,78.556 33.02,77.845 J4.14
LEGB_TOP_RDY_2: J2.7 J4.4 | length 18.9
  Top Layer w0.254: J2.7 33.106,71.81 33.106,73.391 33.377,73.661 v1(33.377,73.809)
  Int2 (PWR) w0.254: v1(33.377,73.809) 33.377,74.877 36,77.5 43.168,77.5 v1(44.425,78.757)
  Bottom Layer w0.254: v1(44.425,78.757) 44.53,78.653 44.947,78.653 45.72,77.88 J4.4
NetC1_dta_2: C1_dta.2 D1_dta.1 R1_dta.3 U1_dta.5 | length 17.1
  Top Layer w0.254: R1_dta.3 26.521,53.02 28.236,53.02 ; C1_dta.2 28.236,53.02 ; U1_dta.5 28.54,48.025 27.565,49 23.715,49 23.34,49.375 23.34,51.3 23.94,51.9 27.767,51.9 28.097,52.23 D1_dta.1 28.236,52.269 28.236,53.02
NetC1_dtb_2: C1_dtb.2 D1_dtb.1 R1_dtb.3 U1_dtb.5 | length 20.4
  Top Layer w0.254: R1_dtb.3 40.9,51.633 C1_dtb.2 39.407,52.611 39.401,52.605 38.395,52.605 37.5,53.5 37.5,58.5 37.895,58.895 45.605,58.895 45.954,58.546 U1_dtb.5
NetC2_1: C2.1 U4.2 | length 17.3
  Top Layer w0.7: C2.1 56.32,64.044 53.78,61.504 53.78,58.202 54.796,57.186 56.32,57.186 57.082,56.424 57.082,54.319 57.844,53.557 U4.2@59.588,53.557
NetC2_2: C2.2 U4.4 | length 5.2
  Top Layer w0.7: C2.2 56.47,59.595 57.393,58.672 57.393,58.292 59.006,56.679 59.006,56.303 59.212,56.097 U4.4@59.588,56.097
NetC5_dta_2: C5_dta.2 D2_dta.2 R2_dta.3 U1_dta.9 | length 21.8
  Top Layer w0.254: U1_dta.9 27.24,42.138 27.748,42.646 27.748,43.976 27.897,44.125 34.515,44.125 35.941,45.551 35.941,50.365 34.507,51.799 D2_dta.2 C5_dta.2 32.703,53.225 R2_dta.3
NetC5_dtb_2: C5_dtb.2 D2_dtb.2 R2_dtb.3 U1_dtb.9 | length 27
  Top Layer w0.254: D2_dtb.2 45.354,51.656 C5_dtb.2 46.88,51.653 R2_dtb.3 47.204,50.205 47.729,49.68 50.442,49.68 50.792,50.03 50.792,63.381 49.53,64.643 47.879,64.643 47.254,64.018 U1_dtb.9@47.254,62.779
NetC8_1: C8.1 R9.2 R11.1 U3.3 | length 5.5
  Bottom Layer w0.254: R9.2 46.609,62.312 46.33,62.033 R11.1 47.938,61.951 C8.1 47.951,62.021 49.003,63.073 49.36,63.073 U3.3@49.558,63.271
NetC11_1: C11.1 U2.2 | length 15.1
  Top Layer w0.7: C11.1 68.512,63.596 71.56,60.548 71.56,54.868 70.249,53.557 U2.2@68.588,53.557
NetC11_2: C11.2 U2.4 | length 3.3
  Top Layer w0.254: C11.2 C11.2@68.588,59.265
  Top Layer w0.7: U2.4@68.588,56.097 C11.2@68.588,59.265
NetD1_dta_2: D1_dta.2 D2_dta.1 R1_dta.2 R2_dta.2 U1_dta.2 | length 12.4
  Top Layer w0.254: R1_dta.2 26.265,50.475 26.74,50 D1_dta.2 30.928,50 R2_dta.2 32.309,49.569 ; U1_dta.2 32.44,49.438 32.309,49.569 ; D2_dta.1 32.309,49.569
NetD1_dtb_2: D1_dtb.2 D2_dtb.1 R1_dtb.2 R2_dtb.2 U1_dtb.2 | length 13.8
  Top Layer w0.254: D1_dtb.2 40.58,54.894 42.054,56.368 U1_dtb.2@42.054,56.879 ; U1_dtb.2 U1_dtb.2@42.084,57.103 ; R2_dtb.2 46.119,54.229 45.454,54.894 D2_dtb.1 43.019,54.894 R1_dtb.2 42.354,55.482 42.084,55.752 42.084,56.368 U1_dtb.2@42.084,57.103 ; U1_dtb.2@42.084,57.103 42.084,56.879 U1_dtb.2@42.084,57.103
NetD3_A: D3.A R3.2 | length 5.9
  Top Layer w0.254: D3.A@47.752,40.732 D3.A D3.A@48.102,40.382
  Top Layer w0.508: D3.A@47.752,40.732 R3.2@47.752,46.174
NetD3_C: D3.C Q1.3 | length 4.1
  Top Layer w0.508: D3.C 48.152,39.024 50.614,41.486 Q1.3
NetD4_A: D4.A R4.2 | length 5.8
  Top Layer w0.254: D4.A 43.383,40.475 D4.A@43.434,40.527
  Top Layer w0.508: D4.A@43.434,40.527 R4.2
NetD5_A: D5.A R5.2 | length 5.7
  Top Layer w0.508: R5.2@45.339,45.974 45.339,40.805 D5.A
NetP3_2: P3.2 R7.1 | length 8.6
  Top Layer w0.254: P3.2 62.187,71.659 v2(62.187,68.959)
  Bottom Layer w0.254: R7.1 59.842,66.615 v2(62.187,68.959)
NetR6_1: R6.1 R7.2 U3.6 | length 4.1
  Bottom Layer w0.254: U3.6 57.388,63.271 R6.1@58.014,62.645 ; R6.1 R6.1@58.014,62.645 ; R7.2 58.014,63.782 R6.1@58.014,62.645
NetR8_2: R8.2 R10.2 U3.5 | length 4
  Bottom Layer w0.254: R10.2 54.762,66.472 R8.2 54.896,66.421 55.169,66.148 55.169,66.065 55.296,65.938 55.296,64.739 55.494,64.541 U3.5
NetR10_1: R10.1 U3.1 U3.2 | length 7
  Bottom Layer w0.254: U3.1 U3.2 50.256,62.199 51.252,62.199 51.689,62.636 R10.1
NetU1_dta_8: U1_dta.8 U1_dta.11 | length 6.9
  Top Layer w0.254: U1_dta.8 25.94,40.825 27.29,39.475 29.415,39.475 29.84,39.9 U1_dta.11
NetU1_dtb_8: U1_dtb.8 U1_dtb.11 | length 7
  Top Layer w0.254: U1_dtb.11@44.654,62.779 44.654,61.652 44.863,61.443 45.074,61.443 45.684,60.833 48.006,60.833 48.514,61.341 48.514,62.739 U1_dtb.8@48.554,62.779
SPEED_BTN: J1.15 J2.15 J5.20 | length 69.9
  Top Layer w0.254: v1(32.512,66.498) 38.558,66.498 40.964,68.904 J2.15 ; v4(40.793,30.837) 40.879,30.752 40.879,28.83 J1.15@40.964,28.745
  Int2 (PWR) w0.254: v1(32.512,66.498) 32.512,66.41 32.004,65.902 32.004,42.901 29.084,39.981 28.551,39.981 v1(25.527,36.957) 30.353,36.957 30.988,36.322 37.44,36.322 37.516,36.246 ; 37.457,36.339 40.936,32.859 40.936,31.716 40.809,31.589 40.809,30.853 v4(40.793,30.837)
  Bottom Layer w0.254: J5.20 25.463,33.563 25.463,36.893 v1(25.527,36.957)
SPEED_TOP: J1.8 J2.8 J5.14 | length 51.2
  Top Layer w0.254: v1(31.419,67.576) 31.419,67.664 31.927,68.172 31.927,73.86 32.964,74.897 J2.8 ; J1.8@32.964,32.995 32.992,33.023 32.992,37.31 v1(33.02,37.338)
  Int2 (PWR) w0.254: v1(31.419,67.576) 32.104,68.261 33.466,68.261 34.163,67.564 34.163,58.293 33.02,57.15 v1(33.02,37.338)
  Bottom Layer w0.254: J5.14 v1(33.02,37.338)
TEMPCLK: J1.1 J2.1 J4.18 | length 52.6
  Top Layer w0.254: v1(23.981,34.161) 23.911,34.091 23.911,30.318 24.765,29.464 26.591,29.464 26.964,29.091 J1.1@26.964,28.745 ; v1(26.289,73.787) 26.289,73.639 26.591,73.338 26.591,72.04 J2.1 26.924,71.627 v2(26.924,67.945)
  Int2 (PWR) w0.254: v1(23.981,34.161) 23.911,34.231 23.911,37.754 26.924,40.767 v2(26.924,67.945)
  Bottom Layer w0.254: v1(26.289,73.787) 26.289,75.029 J4.18
TEMPMEAS_A: J1.20 J5.15 | length 26.7
  Top Layer w0.254: v1(39.079,38.113) 41.897,38.113 44.831,35.179 44.831,33.127 J1.20@44.964,32.995
  Bottom Layer w0.254: J5.15 30.48,29.14 31.75,30.41 31.75,37.173 32.697,38.119 39.073,38.119 v1(39.079,38.113)
TEMPMEAS_B: J2.20 J4.19 | length 27.4
  Top Layer w0.254: v1(44.069,73.787) 44.173,73.891 44.173,74.252 44.964,75.042 J2.20
  Int2 (PWR) w0.254: v1(23.734,71.118) 24.352,70.5 43,70.5 44.069,71.569 v1(44.069,73.787)
  Bottom Layer w0.254: v1(23.734,71.118) 25.398,71.118 J4.19
pads on no net: J3.M1 J3.M2 J4.13 J4.15 J4.17 J4.20 J5.9 J5.16 J5.17 J5.18 J5.19 R1_dta.1 R1_dtb.1 R2_dta.1 R2_dtb.1 U1_dta.3 U1_dta.4 U1_dta.12 U1_dta.13 U1_dtb.3 U1_dtb.4 U1_dtb.12 U1_dtb.13 U2.1 U2.6 U2.7 U4.1 U4.6 U4.7

## Polygon pours and split planes (outlines as drawn)
GND on Top Layer "GND_L01_P001" (solid, pour order 1): 52.9,24.533 52.9,74.676 67.9,74.676 67.9,63.676 70.9,63.676 70.9,61.676 70.9,38.856 70.9,24.387
GND on Top Layer "NONET_L02_P-001" (solid, pour order 7): 59.5,37 59.5,35.5 70.9,35.5 70.9,37
GND on Top Layer "NONET_L02_P-001" (solid, pour order 3): 64.347,53.782 64.341,53.776 59.5,53.776 59.5,58.276 59.6,58.376 64.3,58.376
GND on Int1 (GND) "NONET_L02_P-001" (solid, pour order 5): 22.5,80.5 51.5,80.5 51.5,35.501 59.47,35.501 59.47,39.098 72.478,39.061 72.513,24.5 22.5,24.5
GND on Int1 (GND) "NONET_L02_P-001" (solid, pour order 0): 52.9,39 52.9,74.676 72.5,74.676 72.5,63.676 72.5,39
+15 on Int2 (PWR) "NONET_L02_P-001" (solid, pour order 8): 22.5,34.036 60,34.036 60,70 23,70 23,80.5 72.5,80.5 72.5,24.5 22.5,24.5

## Keep-outs
Keep-Out Layer:
  the board outline again, w0.254

## Silkscreen, mask and mechanical layers (free items; w line width, h text height)
Top Overlay:
  drawing of 29 lines, arcs and shapes, not listed
  text "+15" at 26.127,79.127 h0.76
  text "2" at 24.254,78.254 h1.52
  text "22" at 47.754,78.254 h1.52
  text "+15 | -15 | IS | GND" at 52.578,77.47 h1.02
  text "GND" at 48.895,75.057 h0.76 r90
  text "+5" at 48.895,70.993 h0.76 r90
  text "21" at 49.254,69.754 h1.52
  text "TCLK" at 25.273,68.961 h0.76
  text "1" at 24.375,67.906 h1.52
  text "IGBT Adapter Board 1.0" at 23.317,60.401 h0.76
  text "02.2021" at 23.317,58.877 h0.76
  text "+15" at 60.706,43.434 h1.02
  text "HB" at 48.387,42.926 h1.02 r90
  text "+5" at 43.815,42.164 h1.02 r90
  text "+15" at 46.101,41.91 h1.02 r90
  text "GND" at 60.452,38.608 h1.02
  text "+15" at 25.781,34.925 h0.76
  text "+5" at 61.214,33.528 h1.02
  text "GND" at 49.149,32.131 h0.76 r90
  text "+5" at 49.149,28.067 h0.76 r90
  text "TCLK" at 25.527,26.035 h0.76
Mechanical 1:
  lines w0.254: 20,30 18.889,29.02 18.889,72.2 20,71 ; 22,81 22,83 ; 22,82 73,82 ; 73,81 73,83 ; 74,24 76,24 ; 74,81 75,81 ; 75,24 75,81 ; 76,81 75,81
  text "51mm" at 44.254,83.254 h1.52
  text "52mm" at 77.746,48.254 h1.52 r90
  text "1700mil" at 17.873,45.127 h0.51 r90

## Text inside footprints (layer, text, board x,y; h text height)
P3: Top Overlay "4" at 56.261,70.231 h0.51 r180; Top Overlay "1" at 66,75.976 h0.51 r180